# Altium PCB GAT262 LoRa OTG.PcbDoc
Units mm, origin at the board's own origin, x right, y up, seen from the top; angles counter-clockwise.
Board outline 18 x 36.5 mm, 2 copper layers (Top Layer, Bottom Layer); 19 components, 14 nets, 86 pads, 76 vias.
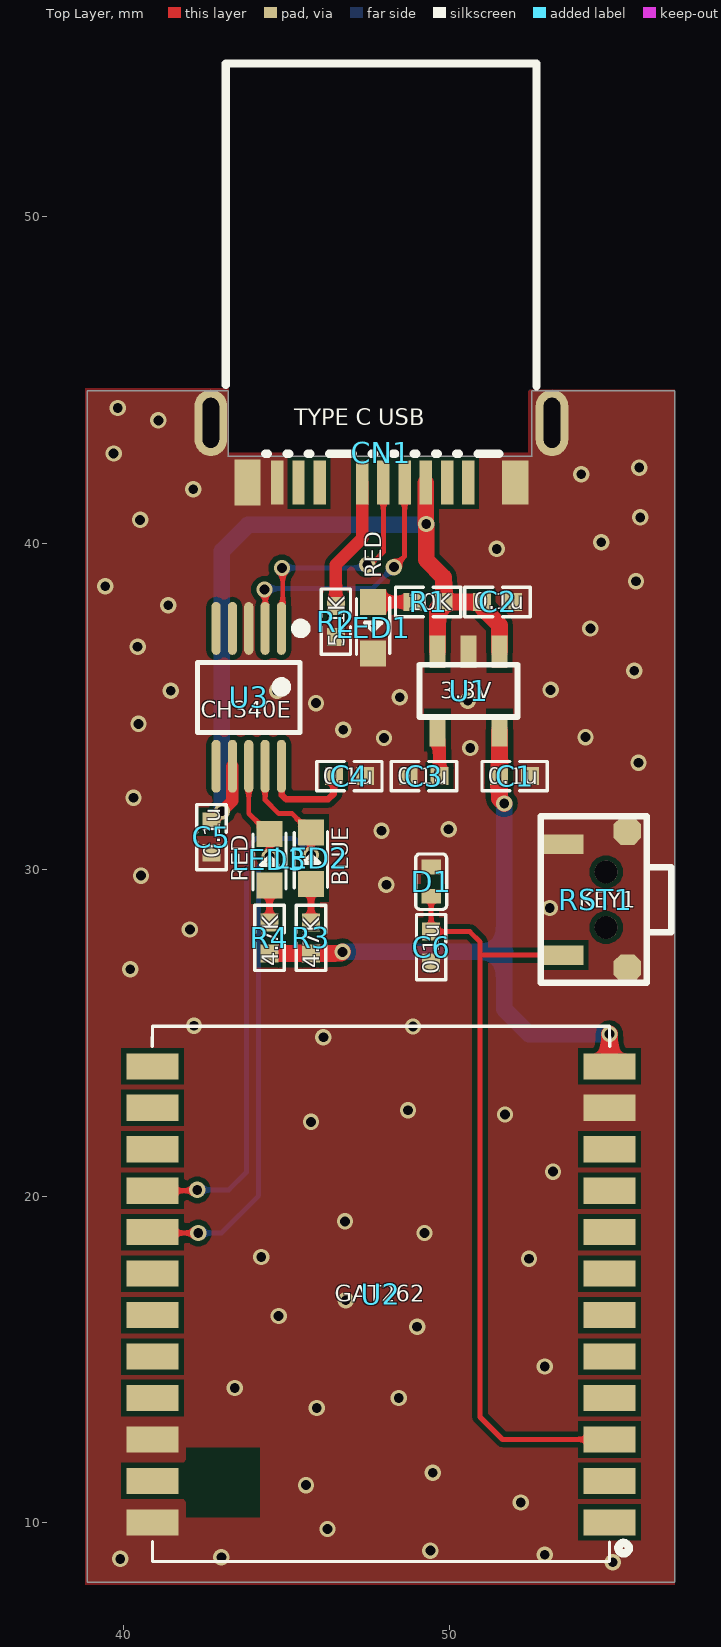
[diagram p0: Top Layer view]
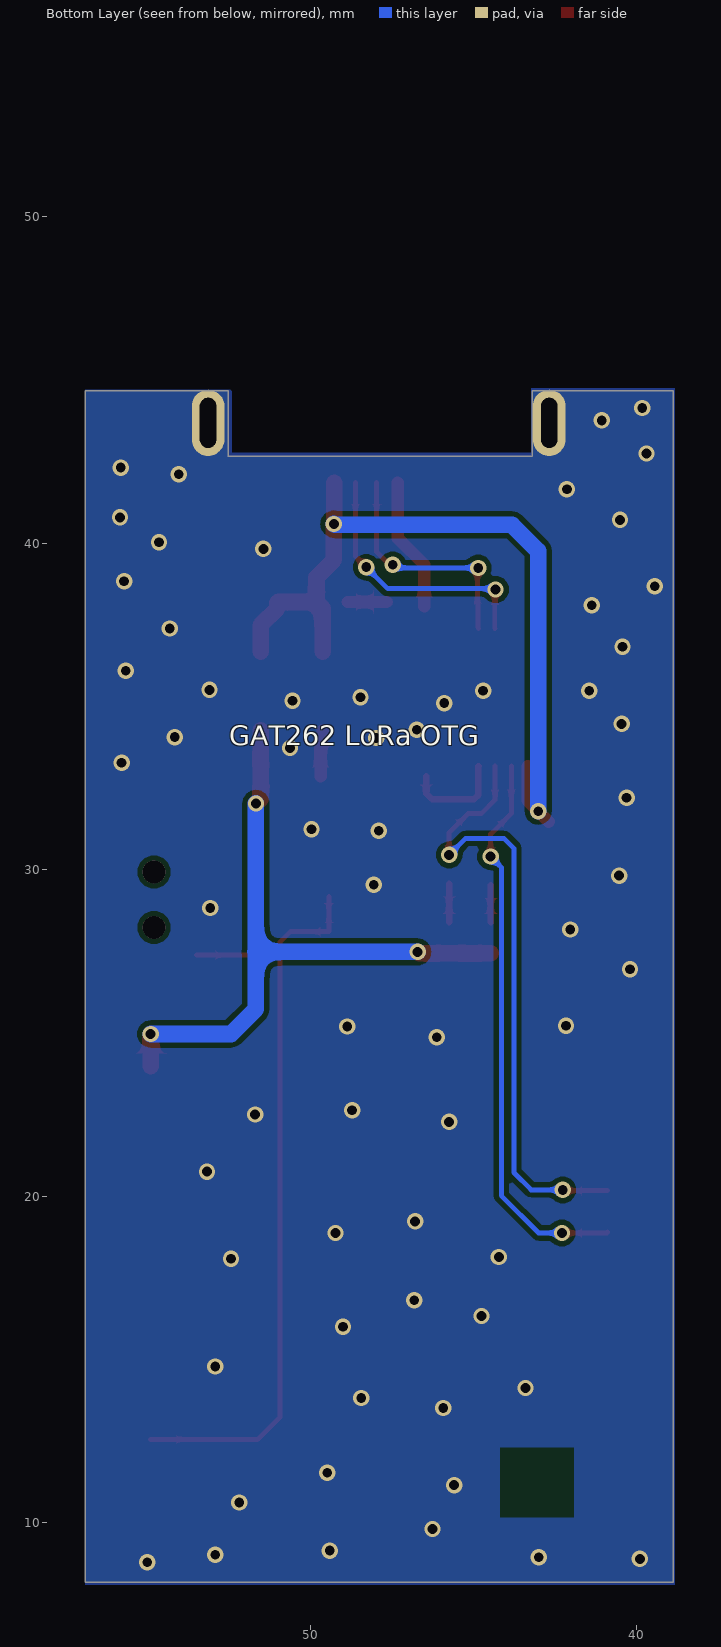
[diagram p1: Bottom Layer view, seen from below]
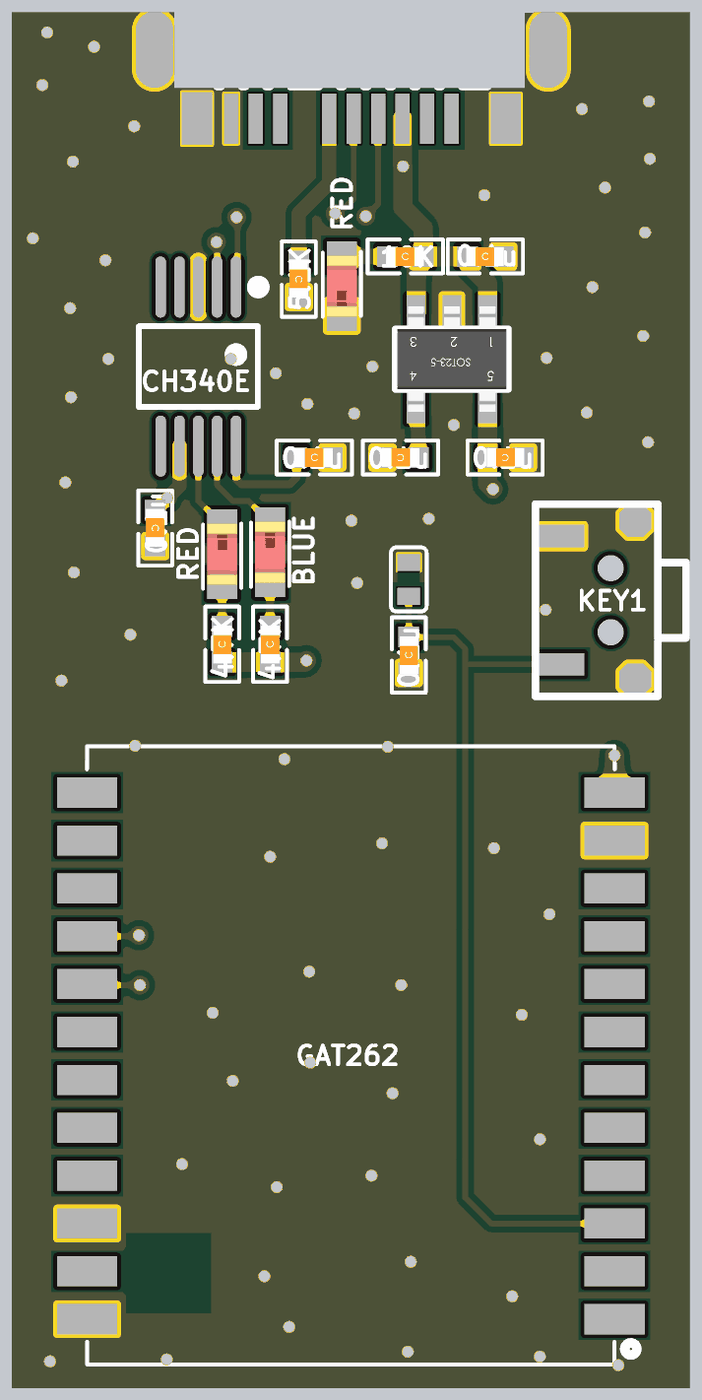
[diagram p2: 3D render of the assembled board from above, using the file's embedded part models]

## Layer stack, top to bottom
Top Solder: solder mask 0.0102, Solder Resist, Dk 3.5
Top Layer: signal copper 0.0356
Dielectric 1: dielectric 0.32, FR-4, Dk 4.8
Bottom Layer: signal copper 0.0356
Bottom Solder: solder mask 0.0102, Solder Resist, Dk 3.5

## Board outline
38.887,8.179 38.887,44.679 43.205,44.679 43.205,42.672 52.505,42.672 52.505,44.672 56.887,44.679 56.887,8.179

## Design rules (kind name [scope] priority, off if disabled: settings)
Clearance [All] p1: gap=0.152 ignorepadtopadclearanceinfootprint=FALSE
DiffPairsRouting [All] p1: maxlimit=0.254 minlimit=0.254 mostfreqgap=0.254 toplayer_minwidth=0.254 toplayer_maxwidth=0.381 toplayer_prefwidth=0.254 bottomlayer_minwidth=0.254 bottomlayer_maxwidth=0.381 bottomlayer_prefwidth=0.254 maxuncoupledlength=12.7
HoleToHoleClearance [All] p1: gap=0.102 allowstackedmicrovias=TRUE
MinimumSolderMaskSliver [All] p1: minsoldermaskwidth=0
PlaneClearance [All] p1: clearance=0.102
PlaneConnect [All] p1: planeconnectstyle=Direct reliefexpansion=0.508 reliefentries=4 reliefconductorwidth=0.254 reliefairgap=0.254
PolygonConnect [All] p1: connectstyle=Direct reliefconductorwidth=0.254 reliefentries=4 polygonreliefangle="90 Angle" airgapwidth=0.254
RoutingVias [All] p1: holewidth=0.3 width=0.5 viastyle="Through Hole" minholewidth=0.3 minwidth=0.5 maxholewidth=0.711 maxwidth=1.27
SilkToSilkClearance [All] p1: silktosilkclearance=0
SilkToSolderMaskClearance [IsPad] p1: minsilkscreentomaskgap=0 clearancetoexposedcopper=TRUE
SolderMaskExpansion [All] p1: expansion=0.102 istentingtop=FALSE
UnRoutedNet [All] p1: checkbadconnections=TRUE
Width [All] p1: maxlimit=0.762 minlimit=0.152 preferedwidth=0.254
22 further rules are at their usual default settings.

## Components (designator, comment, footprint, x,y, rotation, side; value= is the part's Value field where it differs from the comment)
C1 "0.1u" C0402 51.986,32.868 r180 top
C2 "0.1u" C0402 51.46,38.202 r0 top
C3 "0.1u" C0402 49.207,32.868 r180 top
C4 "0.1u" C0402 46.921,32.868 r0 top
C5 "0.1u" C0402 42.697,30.996 r270 top
C6 "0.1u" C0402 49.428,27.628 r90 top
CN1 "TYPE C USB" TYPE-C-9 47.904,42.774 r180 top
D1 "WEP140RF0402" ESD0402 49.428,29.635 r90 top
LED1 "RED" LED0603_RED_3D 47.65,38.202 r270 top
LED2 "BLUE" LED0603_RED_3D 45.745,29.566 r90 top
LED3 "RED" LED0603_RED_3D 44.475,29.515 r90 top
R1 "10K" R0402 49.334,38.202 r0 top
R2 "5.1K" R0402 46.507,37.6 r270 top
R3 "4.7K" R0402 45.745,27.915 r90 top
R4 "4.7K" R0402 44.475,27.915 r90 top
RST1 "KEY1" SMDPUSHBUTTON4X2X3_5 54.788,29.083 r90 top
U1 "3.3V" SOT23-5 51.521,36.678 r0 top
U2 "GAT262" EVBCB-2*1.27 54.889,10.007 r180 top
U3 "CH340E" CH340E 43.84,35.281 r180 top

## Footprints (in the part's own frame and the unit in brackets; to place one, negate y for a bottom-side part, rotate by r counter-clockwise, add the part's x,y. Pads: shape width x height; smd on the part's side, far side on the other; paste and mask are expansions set on the pad)
C0402 [mm]
  rect 0.55x0.55 smd: 1(-0.475,0) 2(0.475,0)
  silkscreen extent -1,-0.45 1,0.45, body extent -0.51,-0.25 0.49,0.25, height 0.49
CH340E [mm]
  oval 0.28x1.62 smd: 1(-1,-2.11) 2(-0.5,-2.11) 3(0,-2.11) 4(0.5,-2.11) 5(1,-2.11) 6(1,2.11) 7(0.5,2.11) 8(0,2.11) 9(-0.5,2.11) 10(-1,2.11)
  silkscreen extent -1.74,-2.26 1.58,1.07
ESD0402 [mm]
  rect 0.45x0.6 smd mask+0.05: 1(-0.45,0) 2(0.45,0)
  Top Layer pour cut-out: -0.225,0.3 0.225,0.3 0.225,-0.3 -0.225,-0.3
  silkscreen extent -0.85,-0.48 0.85,0.48, body extent -0.65,-0.33 0.65,0.33, height 0.8
EVBCB-2*1.27 [mm]
  rect 1.6x0.8 smd: 1(0,0) 2(0,-1.27) 3(0,-2.54) 4(0,-3.81) 5(0,-5.08) 6(0,-6.35) 7(0,-7.62) 8(0,-8.89) 9(0,-10.16) 10(0,-11.43) 11(0,-12.7) 12(0,-13.97) 13(14,-13.97) 14(14,-12.7) 15(14,-11.43) 16(14,-10.16) 17(14,-8.89) 18(14,-7.62) 19(14,-6.35) 20(14,-5.08) 21(14,-3.81) 22(14,-2.54) 23(14,-1.27) 24(14,0)
  silkscreen extent -0.59,-15.2 14,1.2
LED0603_RED_3D [mm]
  rect 0.8x0.8 smd: 1(0,0) 2(1.575,0)
  silkscreen extent -0.13,-0.51 1.6,0.51, body extent -0.02,-0.4 1.6,0.4, height 1.1
R0402 [mm]
  rect 0.55x0.55 smd: 1(-0.475,0) 2(0.475,0)
  silkscreen extent -1,-0.45 1,0.45, body extent -0.51,-0.25 0.49,0.25, height 0.49
SMDPUSHBUTTON4X2X3_5 [mm] "SMDPUSHBUTTON4X2X3_5"
  rect 0.6x1.2 smd: 1(1.7,1.3) 2(-1.7,1.3)
  oct 0.846x0.846 smd: 3(-2.1,-0.65) 4(2.1,-0.65)
  round 0.7 hole 0.7 unplated: " "(-0.85,0) " "(0.85,0)
  silkscreen extent -2.55,-2 2.55,2, body extent -2.55,-2 2.55,2, height 2
SOT23-5 [mm]
  rect 0.5x1 smd: 1(0,0) 2(-0.95,0) 3(-1.9,0) 4(-1.9,-2.4) 5(0,-2.4)
  silkscreen extent -2.45,-2 0.55,-0.4, body extent -2.4,-2.6 0.5,0.2, height 1.09
TYPE-C-9 [mm]
  rect 0.8x1.34 smd paste-100 mask+0.051: 1(-4.1,0.915)
  rect 0.8x1.4 smd paste-100 mask+0.051: 2(4.1,0.915)
  oval 1x2.03 hole 0.5 slot 1.53 at 90 deg: 3(-5.225,-0.915) 4(5.225,-0.915)
  rect 0.38x1.34 smd paste-100 mask+0.051: A1(3.19,0.915) A2(2.54,0.915) A3(1.89,0.915) A5(0.59,0.915) A6(-0.06,0.915) A7(-0.71,0.915) A9(-1.36,0.915) B10(-2.66,0.915) B11(-2.01,0.915)
  silkscreen extent -4.75,-11.92 4.77,0.04, body extent -4.7,-11.94 4.7,1.14, height 0.95

## Part data
C1 C2 C3 C4 C5: library part 0_1.1UF
C6: library part CAP, "Capacitor"
CN1: library part "TYPE-C 9P", "Type-C C2988371"
D1: library part "DIODE SCHOTTKY_1"
LED1 LED2 LED3: library part LED
R1 R2 R3 R4: library part R0402_1.06K_WALSIN, NO_STUFF=., VENDER\PN=WALSIN\WR04X8061FT
U1: library part "REG CAT7101_2"
U2: library part CONNECT_2, "2*12-1.2"

## Via types
v1: diameter 0.5, hole 0.3, Top Layer to Bottom Layer, tented both sides, 76 vias

## Nets (pads, with @x,y where several pads share a name; then routed paths per layer and width w, separated by ;. In a path a pad name is that pad's centre, name@x,y a point inside that pad or via, vN(x,y) a via of type N, cw(c..) or ccw(c..) an arc to the next point about the centre after c; other vN are vias at no path point)
5V: C2.1 C5.1 CN1.A9 R1.2 U1.1 U1.3 U3.7 | length 24.9
  Top Layer w0.381: C5.1 v1(43.019,31.792) 43.34,32.113 U3.7
  Top Layer w0.508: CN1.A9 49.264,40.601 v1(49.276,40.589) 49.276,39.49 49.809,38.957 R1.2 ; U1.3 49.621,38.014 R1.2 ; U1.1 51.521,37.491 51.006,38.006 51.006,38.181 C2.1 R1.2
  Bottom Layer w0.508: v1(43.019,31.792) 43.019,39.768 43.815,40.564 49.251,40.564 v1(49.276,40.589)
D+: CN1.A6 U3.1 | length 7.3
  Top Layer w0.152: U3.1 44.865,37.415 44.865,38.175 44.882,38.192 44.882,39.218 v1(44.856,39.243) ; v1(47.473,39.345) 47.567,39.345 47.7,39.478 47.711,39.478 47.964,39.731 CN1.A6
  Bottom Layer w0.152: v1(44.856,39.243) 47.277,39.243 47.379,39.345 v1(47.473,39.345)
D-: CN1.A7 U3.2 | length 8.2
  Top Layer w0.152: v1(44.323,38.583) 44.348,38.557 44.348,37.399 U3.2 ; v1(48.285,39.268) 48.614,39.597 CN1.A7
  Bottom Layer w0.152: v1(44.323,38.583) 44.348,38.608 47.625,38.608 v1(48.285,39.268)
GND: C1.1 C2.2 C3.2 C4.2 C5.2 C6.1 CN1.1 CN1.2 CN1.3 CN1.4 CN1.A1 D1.2 LED1.2 R2.2 RST1.1 RST1.3 RST1.4 U1.2 U2.11 U2.22 U2.24 U3.3
  other v1: 54.991,8.788 39.903,8.89 43.002,8.941 52.908,9.017 49.403,9.144 46.253,9.804 52.172,10.617 45.593,11.151 49.479,11.532 45.923,13.513 48.438,13.818 43.409,14.122 52.908,14.783 48.997,16.002 44.755,16.332 46.812,16.815 52.426,18.085 44.221,18.136 49.225,18.872 46.787,19.228 53.162,20.752 45.745,22.276 51.689,22.504 48.717,22.631 46.126,24.867 48.87,25.197 42.164,25.222 40.208,26.949 42.037,28.169 53.061,28.829 48.057,29.54 40.538,29.82 47.904,31.191 49.962,31.242 40.31,32.207 55.778,33.274 50.622,33.731 47.981,34.036 54.153,34.061 46.736,34.29 40.462,34.468 45.898,35.103 50.546,35.179 48.463,35.281 41.453,35.484 44.704,35.484 53.086,35.509 55.651,36.093 40.437,36.83 54.305,37.389 41.377,38.1 39.446,38.684 55.702,38.837 51.435,39.827 54.635,40.03 40.513,40.716 55.829,40.792 42.139,41.656 54.026,42.113 55.804,42.316 39.7,42.748 41.072,43.764 39.827,44.145
NetC3_1: C3.1 U1.4 | length 1.4
  Top Layer w0.381: U1.4 49.621,34.028 49.682,33.967 C3.1
NetC4_1: C4.1 U3.10 | length 3.1
  Top Layer w0.203: U3.10 44.851,33.16 44.851,32.289 44.983,32.156 46.268,32.156 46.446,32.335 C4.1
NetCN1_A5: CN1.A5 R2.1 | length 4.1
  Top Layer w0.381: R2.1 46.507,39.345 47.314,40.152 CN1.A5
NetLED1_1: LED1.1 R1.1 | length 1.2
  Top Layer w0.381: LED1.1 R1.1
NetLED2_1: LED2.1 R3.2 | length 1.2
  Top Layer w0.203: R3.2 LED2.1
NetLED3_1: LED3.1 R4.2 | length 1.1
  Top Layer w0.203: R4.2 LED3.1
RST: C6.2 D1.1 RST1.2 U2.3 | length 24.1
  Top Layer w0.152: D1.1 C6.2 50.612,28.103 50.922,27.792 50.922,13.238 51.613,12.548 U2.3 ; 50.927,27.383 RST1.2
RX2: LED3.2 U2.17 U3.8 | length 17.3
  Top Layer w0.152: U2.17 40.915,18.872 v1(42.291,18.872) ; U3.8 43.84,31.725 LED3.2 v1(44.475,30.404)
  Bottom Layer w0.152: v1(42.291,18.872) 43.002,18.872 44.145,20.015 44.145,30.074 v1(44.475,30.404)
TX2: LED2.2 U2.16 U3.9 | length 18.9
  Top Layer w0.152: U2.16 42.24,20.168 v1(42.266,20.193) ; U3.9 44.34,32.139 44.761,31.718 45.168,31.718 LED2.2 v1(45.745,30.455)
  Bottom Layer w0.152: v1(42.266,20.193) 43.231,20.193 43.764,20.726 43.764,30.658 44.069,30.963 45.237,30.963 v1(45.745,30.455)
VDD33: C1.2 R3.1 R4.1 U1.5 U2.12 | length 20.4
  Top Layer w0.508: R4.1 R3.1 46.667,27.44 v1(46.711,27.483) ; U1.5 51.521,32.172 v1(51.664,32.029) ; U2.12 v1(54.889,24.968)
  Bottom Layer w0.508: v1(46.711,27.483) 51.664,27.483 ; v1(51.664,32.029) 51.664,27.483 ; 51.689,27.483 51.664,27.483 ; v1(54.889,24.968) 52.426,24.968 51.664,25.73 51.664,27.483
pads on no net: "RST1. " CN1.A2 CN1.A3 CN1.B10 CN1.B11 U2.1 U2.2 U2.4 U2.5 U2.6 U2.7 U2.8 U2.9 U2.10 U2.13 U2.14 U2.15 U2.18 U2.19 U2.20 U2.21 U2.23 U3.4 U3.5 U3.6

## Polygon pours and split planes (outlines as drawn)
GND on Top Layer "NONET_L-01_P-001" (solid, remove dead copper, pour order 1): 43.231,44.755 43.231,42.774 52.4,42.774 52.4,44.653 52.451,44.704 56.887,44.704 56.887,8.103 38.837,8.103 38.837,44.755
GND on Bottom Layer "NONET_L-01_P-001" (solid, remove dead copper, pour order 0): 43.231,44.755 43.231,42.774 52.4,42.774 52.4,44.653 52.451,44.704 56.887,44.704 56.887,8.103 38.837,8.103 38.837,44.755

## Other copper
Multi-Layer:
  pour cut-out: 41.923,12.294 44.183,12.294 44.183,10.16 44.158,10.16 44.133,10.16 41.923,10.16 41.923,12.217

## Silkscreen, mask and mechanical layers (free items; w line width, h text height)
Bottom Overlay:
  text "GAT262 LoRa OTG" at 52.478,33.806 h0.6
Mechanical 1:
  lines w0.1: 38.887,8.179 56.887,8.179 56.887,44.679 52.505,44.672 52.505,42.672 43.205,42.672 43.205,44.672 43.205,44.679 38.887,44.679 38.887,8.179